# Altium PCB SiLPA.PcbDoc (part 7 of 10)
Units mm, origin at the board's own origin, x right, y up, seen from the top; angles counter-clockwise.
Board outline 222.36 x 100 mm, 4 copper layers (L1, P2, L3, L4), stack 1.598 mm thick; 583 components, 330 nets, 1692 pads, 1781 vias.
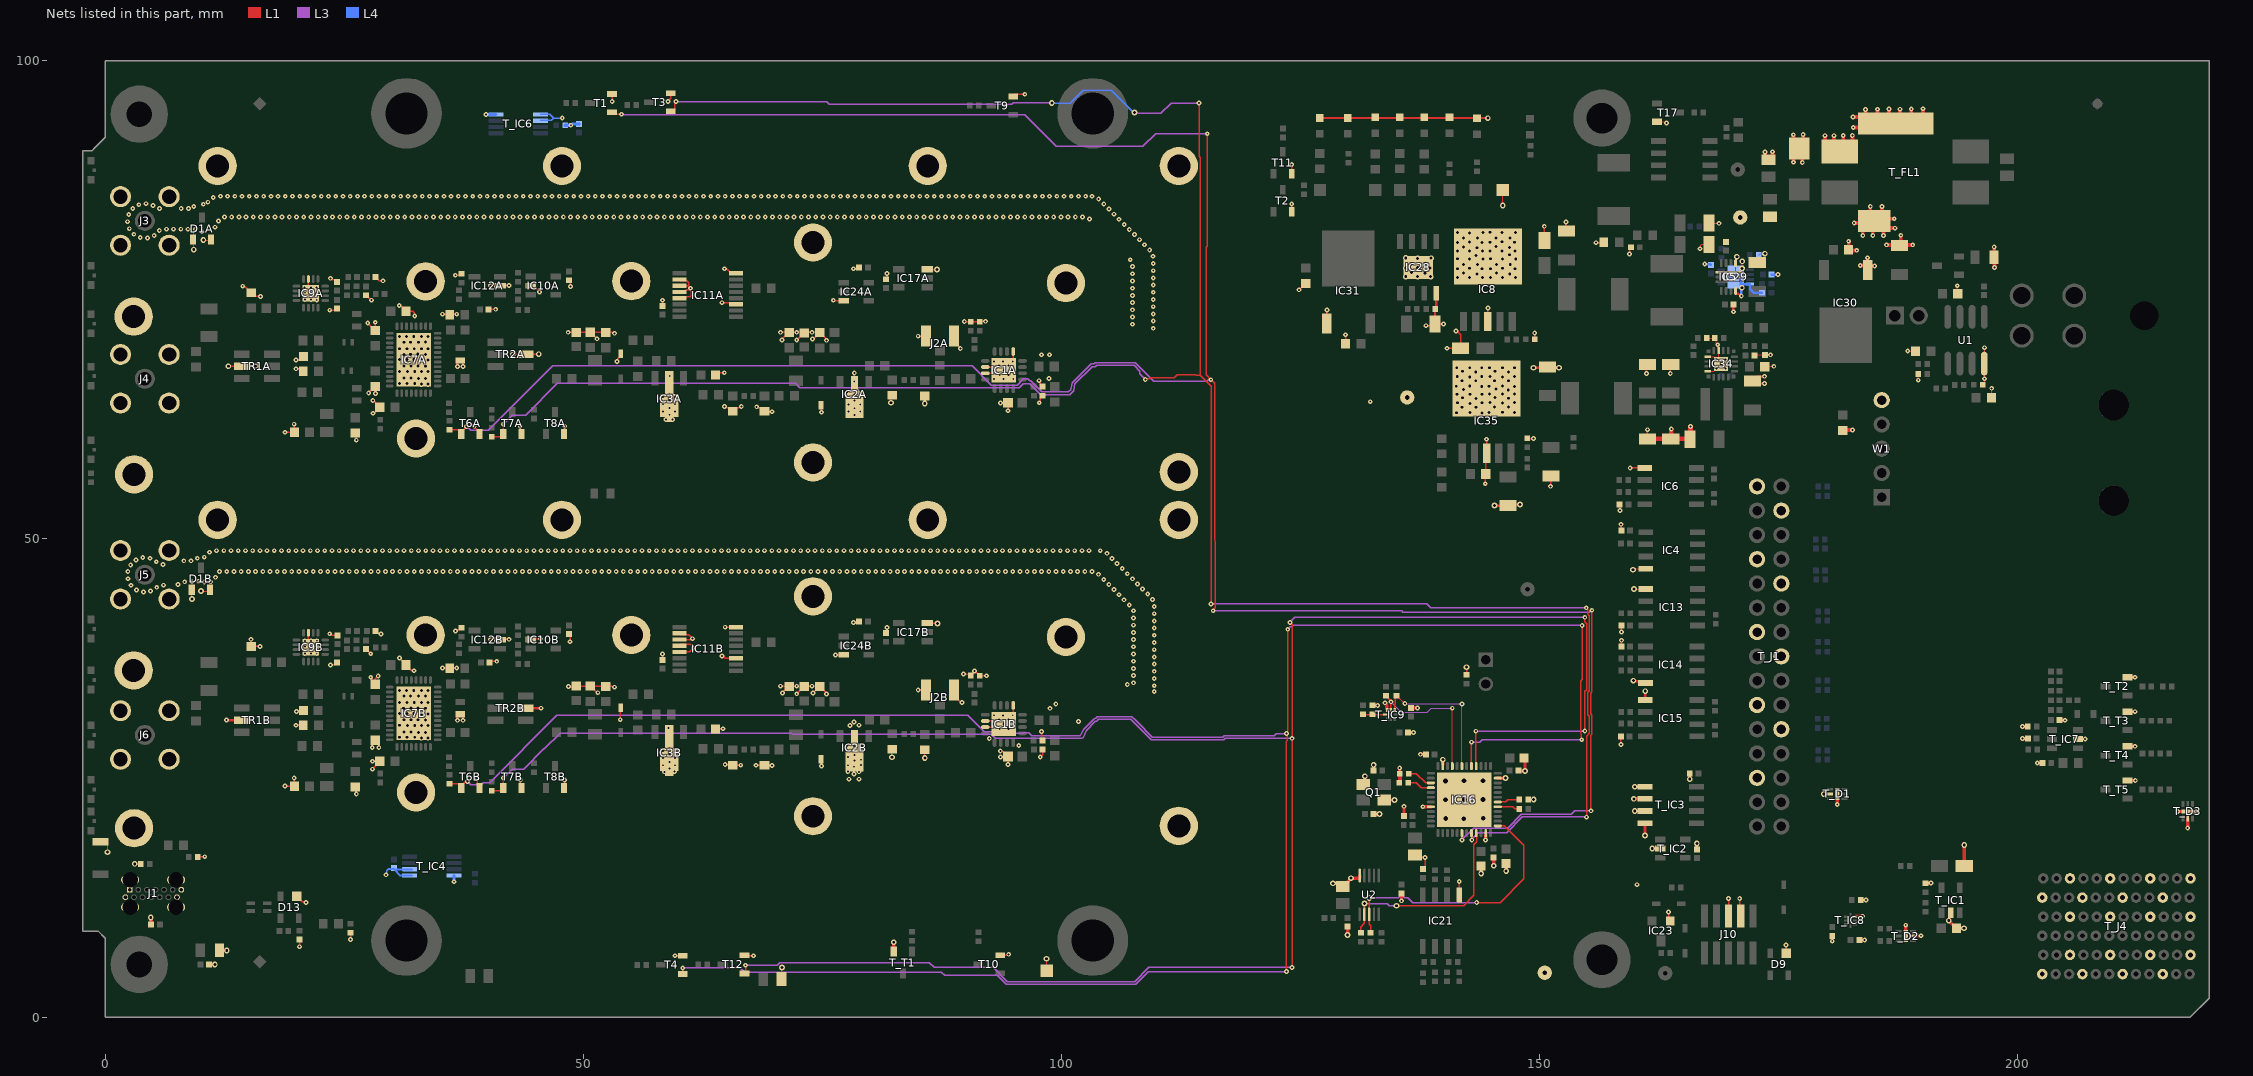
[diagram p7: the nets of this part, all layers, seen from the top]

## Via types
v1: diameter 0.5, hole 0.2, L1 to L4, tented both sides, 1301 vias
v2: diameter 0.6, hole 0.3, L1 to L4, tented both sides, 443 vias
v3: diameter 0.8, hole 0.5, L1 to L4, tented both sides, 25 vias
v4: diameter 0.5, hole 0.2, L1 to L4, 8 vias
v5: diameter 1.27, hole 0.711, L1 to L4, tented both sides, 4 vias

## Nets (pads, with @x,y where several pads share a name; then routed paths per layer and width w, separated by ;. In a path a pad name is that pad's centre, name@x,y a point inside that pad or via, vN(x,y) a via of type N, cw(c..) or ccw(c..) an arc to the next point about the centre after c; other vN are vias at no path point) (continued)
GND: B5A.1 B5B.1 B6A.1 B6B.1 B7A.1 B7B.1 B8A.1 B8B.1 B9A.1 B9B.1 B10A.1 B10B.1 B11A.1 B11B.1 B12A.1 B12B.1 B13A.1 B13B.1 B14A.1 B14B.1 B15A.1 B15B.1 B16A.1 B16B.1 B17A.1 B17B.1 C2A.1 C2B.1 C4A.1 C4B.1 C5A.1 C5B.1 C6A.1 C6B.1 C7A.1 C7B.1 C8A.1 C8B.1 C9A.1 C9B.1 C10.1 C17A.2 C17B.2 C18A.1 C18B.1 C19A.1 C19B.1 C20.1 C21.1 C22.1 C23.1 C24.1 C25.1 C26.1 C27.2 C28.1 C29.1 C30.1 C31.2 C32.1 C33.1 C34.1 C35.1 C36.2 C37.1 C38.1 C39A.1 C39B.1 C40A.1 C40B.1 C41A.2 C41B.2 C47A.1 C47B.1 C48A.1 C48B.1 C49A.1 C49B.1 C50A.1 C50B.1 C53A.1 C53B.1 C55A.2 C55B.2 C56A.1 C56B.1 C57A.2 C57B.2 C58A.1 C58B.1 C59A.1 C59B.1 C60A.2 C60B.2 C61A.1 C61B.1 C62.1 C63.1 C64.1 C65.2 C68.1 C69.1 C71.1 C72.1 C73.1 C74.1 C75.1 C76.1 C77.1 C78.1 C79.1 C80.1 C93.1 C94.1 C95.1 C96.1 C97.1 C98.1 C104.1 C105.1 C106.1 C107.1 C108.2 C110.1 C111.1 C112.1 C113.1 C114.1 C116.1 C245A.2 C245B.2 D1A.1 D1A.2 D1B.1 D1B.2 D2A.1 D2B.1 D3A.1 D3B.1 D9.1 D13.1 IC1A.5 IC1A.10 IC1A.11 IC1A.17 IC1B.5 IC1B.10 IC1B.11 IC1B.17 IC2A.2 IC2B.2 IC3A.2 IC3A.4 IC3B.2 IC3B.4 IC4.4 IC5.3 IC5.4 IC5.11 IC6.5 IC7A.41 IC7B.41 IC8.3 IC8.6 IC9A.11 IC9A.17 IC9B.11 IC9B.17 IC10A.2 IC10B.2 IC11A.3 IC11A.8 IC11A.10 IC11A.11 IC11A.12 IC11A.13 IC11B.3 IC11B.8 IC11B.10 IC11B.11 IC11B.12 IC11B.13 IC12A.2 IC12B.2 IC13.5 IC14.4 IC15.5 IC16.8 IC16.23 IC16.35 IC16.47 IC16.49 IC17A.3 IC17B.3 IC21.5 IC23.1 IC24A.3 IC24B.3 IC28.8 IC28.9 IC29.8 IC29.9 IC30.1 IC31.1 IC34.3 IC34.5 IC34.8 IC34.17 IC35.3 IC35.6 J1.1 J1.2 J1.3 J1.4 J1.A1 J1.A12 J1.B1 J1.B12 J2A.2 J2B.2 J3.2 J4.2 J5.2 J6.2 J10.3 J10.5 L18A.1 L18B.1 LD11.1 LD12.1 LD13.1 LD14.1 LD16.1 LD18.1 Q1.2 Q1.4 R1A.1 R1B.1 R2A.1 R2B.1 R7A.1 R7B.1 R8A.1 R8B.1 R9A.1 R9B.1 R10A.1 R10B.1 R13.2 R18A.1 R18B.1 R21A.1 R21B.1 R27A.1 R27B.1 R30.1 R33A.1 R33B.1 R48.1 R50.1 R58.1 R63.2 R68.1 R70.2 R76.1 R77.1 R78.1 R81.1 R83.1 R91.1 R94.2 R95.2 R101.2 R102.1 R103.1 SW1.2 T1.2 T2.2 T3.2 T4.2 T6A.2 T6B.2 T7A.2 T7B.2 T8A.2 T8B.2 T9.2 T10.2 T11.2 T12.2 T17.2 T_B4.1 T_B5.1 T_B6.1 T_C1.1 T_C2.2 T_C3.1 T_C4.1 T_C5.1 T_C8.1 T_C9.1 T_C10.1 T_C12.2 T_C13.2 T_C16.1 T_C20.1 T_C22.1 T_C23.1 T_C24.1 T_C25.1 T_D1.2 T_D1.7 T_D2.2 T_D2.7 T_D3.2 T_D3.7 T_D5.2 T_FL1.4 T_IC1.2 T_IC2.2 T_IC3.1 T_IC3.2 T_IC3.3 T_IC3.4 T_IC4.4 T_IC4.5 T_IC4.6 T_IC6.4 T_IC6.5 T_IC6.6 T_IC7.2 T_IC8.4 T_IC9.4 T_J1.1 T_J1.4 T_J1.7 T_J1.10 T_J1.13 T_J1.16 T_J1.19 T_J1.22 T_J1.25 T_J4.A2 T_J4.A4 T_J4.A6 T_J4.C1 T_J4.C5 T_J4.D2 T_J4.D4 T_J4.D6 T_J4.F1 T_J4.F5 T_J4.G2 T_J4.G4 T_J4.G6 T_J4.I1 T_J4.I5 T_J4.J2 T_J4.J4 T_J4.J6 T_J4.L1 T_J4.L5 T_LD4.1 T_R7.1 T_R19.1 T_R25.1 T_R26.2 T_R27.2 T_R30.1 T_R69.1 T_T1.2 T_T2.2 T_T3.2 T_T4.2 T_T5.2 TP22.1 TP23.1 TR1A.2 TR1B.2 TR2A.2 TR2B.2 U1.4 U2.10 W1.5 | length 390.5
  L1 w0.127: SW1.2@-0.5,18.32 -0.087,18.32 0.233,18.001 v2(0.233,17.25) ; v2(3.075,16.025) 3.698,16.025 R94.2@3.721,16.002 ; D1B.1@9.05,44.687 9.056,44.681 v2(9.056,43.71) ; v2(9.25,80.25) 9.25,81.205 D1A.1@9.162,81.293 9.265,81.396 9.265,82.144 9.407,82.286 v1(9.407,82.387) ; v2(10,44.544) 10.807,44.544 D1B.2@10.95,44.687 ; v2(10.25,81.25) 11.018,81.25 D1A.2@11.062,81.293 ; T_R27.2@70.71,4 70.75,4.04 v2(70.75,5.19) ; v1@78.325,67.3 78.325,66.353 IC2A.2@78.333,66.344 ; v2(82.157,64.24) 82.157,64.877 R8A.1@82.3,65.02 ; v2(82.25,27.169) 82.25,27.97 R8B.1@82.3,28.02 ; R7B.1@85.67,27.95 85.7,27.92 v2(85.7,27.1) ; R7A.1@85.67,64.95 85.68,64.94 v2(85.68,64.169) ; v2(98.425,6.1) 98.425,4.865 TP23.1@98.45,4.84 ; v2(146.13,84.852) TP22.1@146.13,86.5 ; R76.1@148.77,22.742 148.79,22.762 v2(149.36,22.762) ; v2(159.75,46.77) 159.851,46.77 159.976,46.895 IC4.4@161.079,46.895 ; v2(159.851,44.762) IC13.5@161.078,44.762 ; T17.2@162.275,93.625 163.024,93.625 163.149,93.5 v1(163.25,93.5) ; v1(166.75,80.344) 166.821,80.415 166.821,80.692 166.92,80.79 C33.1@167.685,80.79 ; R102.1@167.47,71 R101.2@168.28,71 168.433,70.847 v1@168.433,70.371 ; IC34.8@167.55,67.55 168.2,67.55 IC34.17@168.425,67.775 ; IC34.5@167.55,69.05 168.2,69.05 v1(168.475,68.775) ; C35.1@167.685,83.047 167.732,83 v1(168.75,83) ; v1@168.5,70.25 168.531,70.25 168.654,70.128 168.654,69.746 IC34.3@168.7,69.7 168.7,68.55 v1(168.95,68.3) ; IC5.3@169.729,77.89 IC5.3@170.399,77.89 ; IC5.4@170.5,78.5 170.493,78.5 170.479,78.485 170.479,77.97 IC5.3@170.399,77.89 ; v2(171.152,78.294) 171.061,78.204 171.061,78.044 170.907,77.89 IC5.3@170.399,77.89 ; v2@171.163,78.306 171.163,79.013 v2(171.175,79.025) ; C110.1@172.429,69.201 172.478,69.25 C111.1@173.529,69.25 v1(174.125,69.25) ; T_C10.1@173.522,89.684 T_C10.1@173.547,89.709 ; C108.2@173.525,68 173.575,68.05 v1(174.47,68.05) ; T_C10.1@174.316,89.709 T_C10.1@174.341,89.734 ; T_D5.2@176.486,91.478 T_D5.2@176.511,91.503 ; T_D5.2@176.518,90.142 T_D5.2@176.543,90.167 ; T_D5.2@177.451,90.128 T_D5.2@177.476,90.153 ; T_D5.2@177.511,91.503 T_D5.2@177.536,91.528 ; T_FL1.4@179.799,91.387 T_FL1.4@179.824,91.412 ; T_FL1.4@180.725,91.387 T_FL1.4@180.75,91.412 ; C69.1@181.7,61.35 C69.1@181.75,61.4 ; T_FL1.4@181.703,91.412 T_FL1.4@181.728,91.437 ; C68.1@182.275,80.35 C68.1@182.3,80.375 ; T_FL1.4@182.655,91.412 T_FL1.4@182.68,91.437 ; T_FL1.4@183.503,94.122 T_FL1.4@183.528,94.097 ; T_FL1.4@183.53,93.025 T_FL1.4@183.555,93 ; T_FL1.4@183.628,83.022 T_FL1.4@183.653,82.997 ; T_FL1.4@183.777,82.497 T_FL1.4@183.802,82.522 ; T_FL1.4@184.022,94.122 T_FL1.4@184.047,94.147 ; IC30.1@184.237,78.572 IC30.1@184.262,78.547 ; IC30.1@184.237,78.624 IC30.1@184.262,78.649 ; IC30.1@184.263,78.597 IC30.1@184.288,78.572 ; T_FL1.4@184.533,83.98 T_FL1.4@184.558,84.005 ; T_FL1.4@184.819,82.497 T_FL1.4@184.844,82.522 ; T_FL1.4@185.289,94.147 T_FL1.4@185.314,94.172 ; T_FL1.4@185.75,83.98 T_FL1.4@185.775,84.005 ; T_FL1.4@185.953,82.497 T_FL1.4@185.978,82.522 ; T_FL1.4@186.351,82.522 T_FL1.4@186.376,82.497 ; T_FL1.4@186.351,83.57 T_FL1.4@186.376,83.545 ; T_FL1.4@186.478,94.172 T_FL1.4@186.503,94.197 ; T_FL1.4@187.636,94.155 T_FL1.4@187.661,94.18 ; v1(188.475,69.65) 189.275,69.65 C112.1@189.3,69.625 ; T_FL1.4@188.816,94.167 T_FL1.4@188.841,94.192 ; R58.1@189.56,67.25 189.575,67.235 v1(189.575,66.6) ; T_FL1.4@190.031,94.202 T_FL1.4@190.056,94.227 ; v1(193.65,76.475) 193.65,75.675 C113.1@193.7,75.625 ; R68.1@196.295,66.125 196.5,66.33 v1(196.5,66.75) U1.4@196.5,67.8 ; U1.4@196.5,68.95 v1(196.5,70) ; C93.1@197.25,64.7 v1(197.25,65.75) ; R91.1@197.5,79.45 R91.1@197.55,79.4 ; R91.1@197.5,79.7 R91.1@197.513,79.713
  L1 w0.152: R13.2@9.67,16.754 9.691,16.775 v1(10.4,16.775) ; v2(12.866,68.055) TR1A.2@14.257,68.055 ; TR1A.2@14.265,68.047 14.273,68.055 v2(15.718,68.055) ; v1(14.375,76.43) 14.442,76.363 14.617,76.363 15.2,75.78 15.25,75.78 15.654,75.376 16.203,75.376 v1(16.221,75.358) ; v1(15.25,39.5) 15.25,38.78 R27B.1@15.28,38.75 15.296,38.766 v1(16.163,38.766) ; v1(18.8,24.156) 19.766,24.156 C40B.1@19.77,24.16 19.75,24.18 v1(19.75,25) ; v1(18.8,61.156) 19.766,61.156 C40A.1@19.77,61.16 19.75,61.18 v1(19.75,62) ; v1(19.933,30.521) R21B.1@20.69,30.521 ; v1(19.933,67.786) 20.426,67.786 R21A.1@20.69,67.521 ; v1(19.933,68.705) 20.385,68.705 C50A.1@20.74,69.06 ; v1(19.997,31.961) 20.641,31.961 C50B.1@20.74,32.06 ; D13.1@20.016,12.645 20.599,12.063 20.906,12.063 v1(20.973,11.996) ; v1(20.32,7.366) C74.1@20.32,8.128 ; IC9B.11@21.24,40.18 21.24,39.46 IC9B.17@21.3,39.4 ; IC9A.11@21.24,77.18 21.24,76.46 IC9A.17@21.3,76.4 ; v1(23.463,40.081) 23.557,40.081 23.712,39.925 24.251,39.925 C60B.2@24.286,39.89 ; v1(23.467,73.92) 24.029,73.92 C59A.1@24.209,74.1 ; v1(23.554,36.815) 23.605,36.866 23.975,36.866 C59B.1@24.209,37.1 ; v1(23.554,77.25) 23.648,77.25 23.784,77.114 23.975,77.114 C60A.2@24.209,76.88 ; v1(25.654,8.128) R70.2@25.654,8.801 ; C39B.1@26.136,24.075 26.25,23.961 v1(26.25,23.325) ; C39A.1@26.136,61.075 26.25,60.961 v1(26.25,60.325) ; C55B.2@27.27,38.48 27.754,37.996 v1(27.754,37.99) ; C55A.2@27.27,75.48 27.785,74.965 v1(27.843,74.965) ; v1(27.442,72.566) 27.442,72.558 C41A.2@28.25,71.75 ; v1(27.539,65.25) 27.539,65.289 28.25,66 v1(28.25,65.2) ; v1(27.754,35.537) 27.754,35.484 27.851,35.387 27.851,35.149 28.25,34.75 28.25,35.374 v1(28.536,35.66) ; v1(27.917,28.2) 27.917,28.667 28.25,29 28.605,28.645 v1(28.605,28.2) ; v1(27.95,25.923) 27.95,25.975 28.7,26.725 C49B.1@28.7,26.75 v1(27.95,26.75) ; v1(27.978,64.475) 28,64.475 28.7,63.775 28.7,63.725 28.179,63.204 28.067,63.204 v1(28,63.137) ; C41A.2@28.227,71.773 v1(28.227,72.66) ; C53B.1@28.275,40.375 28.508,40.141 28.696,40.141 28.767,40.071 v1(28.821,40.071) ; C53A.1@28.275,77.375 28.66,76.989 v1(29.051,76.989) ; v1(30.733,74.397) 30.8,74.33 30.954,74.33 31.445,73.84 C48A.1@31.445,73.815 32.133,73.815 32.289,73.658 32.289,73.374 v1(32.356,73.307) ; v1(30.75,37.537) 31.046,37.241 31.046,37.214 C48B.1@31.445,36.815 31.445,36.79 31.843,36.391 31.868,36.391 31.979,36.281 32.199,36.281 v1(32.266,36.215) ; v1(35.25,36.5) 35.967,36.5 R18B.1@36.006,36.461 36.045,36.5 v1(36.75,36.5) ; v1(35.25,73.5) 35.967,73.5 R18A.1@36.006,73.461 36.045,73.5 v1(36.75,73.5) ; v1(36.6,77.575) 37.105,77.575 R33A.1@37.25,77.72 ; v1(36.606,40.375) 36.7,40.375 36.832,40.506 37.036,40.506 R33B.1@37.25,40.72 ; v1(38.589,61.793) 38.656,61.726 38.656,61.623 39.118,61.16 T6A.2@39.118,60.96 ; v1(38.81,25) 38.87,24.941 38.87,24.209 T6B.2@39.118,23.96 ; C57A.2@40.079,73.974 40.11,74.005 v1(40.821,74.005) ; C57B.2@40.178,37.1 40.278,37.2 v1(40.929,37.2) ; v1(40.25,39.5) 41.255,39.5 IC12B.2@41.286,39.469 41.317,39.5 v1(42.2,39.5) ; v1(40.25,76.5) 41.255,76.5 IC12A.2@41.286,76.469 41.317,76.5 v1(42.2,76.5) ; v2(42.624,69.31) 43.958,69.31 43.965,69.303 43.982,69.32 v2(45.331,69.32) ; v1(43.4,24.793) 43.4,24.07 T7B.2@43.51,23.96 ; v1(43.4,61.793) 43.4,61.07 T7A.2@43.51,60.96 ; IC10B.2@44.49,39.48 44.575,39.565 v1(45.5,39.565) ; IC10A.2@44.49,76.48 44.74,76.48 45.404,75.816 v1(45.417,75.816) ; T8B.2@47.977,23.96 48.017,24.001 v1(48.017,24.793) ; T8A.2@47.977,60.96 48.017,61.001 v1(48.017,61.793) ; v1(48.4,71.6) C9A.1@49.26,71.6 C8A.1@50.765,71.6 ; C61B.1@48.5,40.05 48.6,39.95 v1(48.6,39.25) ; C61A.1@48.5,77.05 48.642,76.908 v1(48.642,76.4) ; v1@48.586,34.49 C9B.1@49.382,34.49 ; C9B.1@49.26,34.6 C8B.1@50.765,34.6 ; C8B.1@50.731,34.609 50.756,34.609 C8B.1@50.765,34.6 ; C8A.1@50.731,71.609 50.756,71.609 C8A.1@50.765,71.6 ; v1(51.425,70.925) 51.425,70.94 C8A.1@50.765,71.6 ; v1(51.5,33.925) 51.44,33.925 C8B.1@50.765,34.6 ; C7B.1@52.25,34.5 52.15,34.6 C8B.1@50.765,34.6 ; C7A.1@52.25,71.5 52.15,71.6 C8A.1@50.765,71.6 ; C7B.1@52.31,34.59 53.107,34.59 53.197,34.5 v1(53.25,34.5) ; C7A.1@52.31,71.59 53.107,71.59 53.197,71.5 v1(53.25,71.5) ; T1.2@52.985,96.52 53,96.505 v1(53,95.75) ; v1(53.5,68.545) 53.567,68.612 53.567,68.837 53.89,69.16 D3A.1@53.89,69.36 ; v1(53.85,31.097) 53.85,32.32 D3B.1@53.89,32.36 ; C56B.1@58.268,37.35 v1(58.268,37.956) ; C56A.1@58.268,74.35 v1(58.268,74.956) ; v1(58.85,95.725) 58.85,95.816 59.114,96.081 T3.2@59.114,96.609 ; v1(59.561,6.418) T4.2@60.386,6.418 ; IC11B.13@60.05,38.175 60.199,38.324 60.298,38.224 60.398,38.324 60.497,38.224 61.098,38.224 v1(61.469,38.595) 61.469,38.689 61.348,38.81 61.348,38.846 61.203,38.99 60.788,38.99 60.771,38.974 60.199,38.974 IC11B.12@60.05,38.825 ; IC11B.11@60.05,39.475 61.213,39.475 61.243,39.505 61.277,39.505 61.307,39.475 v1(61.403,39.571) 60.998,39.976 60.199,39.976 IC11B.10@60.05,40.125 ; IC11A.13@60.05,75.175 60.199,75.324 61.173,75.324 61.262,75.413 61.262,76.149 v1(61.196,76.216) 61.141,76.216 v1@61,76.075 ; IC11A.12@60.05,75.825 60.55,75.825 60.8,76.075 v1@61,76.075 ; IC11A.11@60.05,76.475 61,76.475 ; IC11A.10@60.05,77.125 60.199,76.976 60.822,76.976 61,76.798 61,76.475 ; C2B.1@63.81,30.12 63.84,30.15 v1(64.594,30.15) ; C2A.1@63.81,67.12 64.062,67.372 v1(64.727,67.372) ; v1(64.5,37.75) 64.594,37.75 64.819,37.525 IC11B.3@65.95,37.525 ; v1(64.5,74.706) 64.532,74.674 65.801,74.674 IC11A.3@65.95,74.525 ; v1(64.742,63.835) 64.836,63.835 64.957,63.714 65.236,63.714 R10A.1@65.61,63.34 65.984,63.714 66.272,63.714 66.411,63.853 v1(66.505,63.853) ; v1(64.75,78.25) 64.788,78.212 65.013,78.212 65.45,77.775 IC11A.8@65.95,77.775 ; v1(64.819,26.4) 65.55,26.4 R10B.1@65.61,26.34 v1(66.45,26.34) ; v1(64.819,40.775) IC11B.8@65.95,40.775 ; T12.2@66.838,6.458 66.878,6.418 v1(67.79,6.418) ; v1(68.04,26.331) 68.939,26.331 68.97,26.3 v1(69.7,26.3) ; v1(68.11,63.812) 68.204,63.812 68.302,63.714 68.556,63.714 68.97,63.3 v1(69.7,63.3) ; v1(70.6,34.6) 71.51,34.6 C6B.1@71.52,34.59 ; v1(70.6,71.6) 71.51,71.6 C6A.1@71.52,71.59 ; v1(70.759,70.79) 70.759,70.854 71.495,71.59 C6A.1@71.52,71.59 ; v1(70.8,33.9) 70.805,33.9 71.495,34.59 C6B.1@71.52,34.59 ; v1(72.3,33.8) 72.325,33.8 73.075,34.55 C4B.1@73.1,34.55 73.15,34.6 v1(73.9,34.6) ; v1(72.3,34.6) 71.53,34.6 C6B.1@71.52,34.59 ; v1(72.3,70.8) 72.325,70.8 73.075,71.55 C4A.1@73.1,71.55 73.15,71.6 v1(73.9,71.6) ; v1(72.3,71.6) 71.53,71.6 C6A.1@71.52,71.59 ; v1(73.95,70.9) 74.016,70.9 74.551,71.435 C5A.1@74.7,71.435 ; v1(74,33.9) 74.016,33.9 74.576,34.46 C5B.1@74.7,34.46 ; C5B.1@74.715,34.574 74.715,34.46 74.855,34.46 75.341,33.974 75.341,33.84 v1(75.407,33.774) ; C5A.1@74.715,71.574 74.715,71.435 74.88,71.435 75.352,70.962 75.352,70.833 v1(75.419,70.767) ; D2B.1@74.85,26.98 74.881,26.949 v1(74.881,26.25) ; D2A.1@74.85,63.98 74.881,63.949 v1(74.881,63.25) ; v1(76.125,74.956) 76.187,74.895 IC24A.3@77.233,74.895 ; v1(76.35,37.875) 77.213,37.875 IC24B.3@77.233,37.895 ; v1(78.25,41.25) 78.708,41.25 C245B.2@78.833,41.375 ; v1(78.25,78.25) 78.708,78.25 C245A.2@78.833,78.375 ; C58B.1@81.64,40.15 81.75,40.26 v1(81.75,40.75) ; C58A.1@81.64,77.15 81.75,77.26 v1(81.75,77.75) ; v1(85,34.2) 85.785,34.2 J2B.2@85.805,34.22 ; v1(85,71.2) 85.785,71.2 J2A.2@85.805,71.22 ; IC17B.3@85.792,41.25 85.877,41.164 v2(87.015,41.164) ; IC17A.3@85.94,78.209 85.95,78.219 85.997,78.172 v2(86.964,78.172) v2@86.917,78.219 ; J2B.2@88.755,34.22 88.755,33.645 89.509,32.891 v1(89.588,32.891) ; J2A.2@88.755,71.22 88.755,70.645 89.405,69.995 v1(89.405,69.903) ; v1(89.75,35.869) 90.351,35.869 R1B.1@90.5,35.72 90.52,35.72 90.734,35.934 90.734,35.954 90.8,36.02 v1@90.8,36.1 ; v1(89.825,72.725) 90.495,72.725 R1A.1@90.5,72.72 91.43,72.72 R2A.1@91.44,72.71 91.48,72.75 v1(92.05,72.75) ; v1(90.9,36.2) 90.93,36.2 91.42,35.71 R2B.1@91.44,35.71 91.458,35.692 v1(92.154,35.692) ; IC1B.11@92.012,30.321 92.979,30.321 IC1B.17@93,30.3 ; IC1B.10@92.012,30.971 92.971,30.971 IC1B.17@93,31 ; IC1A.11@92.012,67.321 92.979,67.321 IC1A.17@93,67.3 ; IC1A.10@92.012,67.971 92.971,67.971 IC1A.17@93,68 ; T10.2@93.592,6.476 94.319,6.476 94.409,6.566 v1(94.462,6.566) ; v1(93.592,27.831) 93.659,27.764 93.876,27.764 C18B.1@94.39,27.25 ; v1(93.6,27.2) 94.34,27.2 C18B.1@94.39,27.25 ; v1(93.6,64.2) 94.34,64.2 C18A.1@94.39,64.25 94.4,64.24 v1(94.4,63.4) ; IC1B.17@93.808,30.8 IC1B.17@93.962,30.646 ; IC1A.17@93.808,67.8 IC1A.17@93.962,67.646 ; v1(94.4,26.4) 94.4,27.24 C18B.1@94.39,27.25 ; IC1B.17@94.9,31.7 94.937,31.737 IC1B.5@94.937,32.596 ; IC1A.17@94.9,68.7 94.937,68.737 IC1A.5@94.937,69.596 ; T9.2@94.941,96.25 95.164,96.474 96.126,96.474 v1(96.153,96.5) ; v1(97.63,66.55) 97.63,66.456 97.746,66.34 97.746,66.164 C17A.2@97.98,65.93 ; v1(97.661,64.24) 97.661,64.334 97.756,64.43 97.756,64.736 C19A.1@97.99,64.97 ; v1(97.76,27.2) 97.76,27.21 98,27.45 98,27.96 C19B.1@97.99,27.97 ; v1(97.903,29.873) 97.903,29.007 C17B.2@97.98,28.93 ; T2.2@124.066,84.2 v1(124.066,85.025) ; T11.2@124.066,88.186 v1(124.066,89.156) ; v1(124.825,76.05) 124.839,76.05 125.515,76.726 C98.1@125.54,76.726 ; IC31.1@127.707,72.543 127.745,72.582 v1(127.745,73.943) ; C97.1@129.687,70.41 v1(129.687,71.354) ; C94.1@136.948,16.925 137.173,16.7 v1(137.999,16.7) 137.999,15.689 C116.1@137.775,15.465 ; v1(138.104,72.297) 138.867,72.297 C30.1@139.049,72.479 139.069,72.46 v1(139.944,72.46) ; v1(140.29,69.94) C31.2@141.7,69.94 141.711,69.951 141.711,71.354 141.315,71.75 v1(141.25,71.75) ; IC21.5@141.575,12.775 v1(141.575,14.17) ; R63.2@142.336,35.796 v2(142.336,36.592) ; v1(144.3,55.772) 144.3,56.744 C26.1@144.344,56.788 144.344,58.859 IC35.3@144.44,58.955 v1(144.44,60.426) ; IC8.3@144.566,72.74 144.578,72.752 v1(144.578,74.14) ; R103.1@148.684,60.52 148.717,60.487 v1(149.348,60.487) ; R81.1@149.464,70.881 v1(149.464,71.545) ; C27.2@150.473,81.19 v1(150.473,82.69) ; v1(151.121,55.498) 151.121,56.529 C106.1@151.177,56.586 ; v1(152.725,83.15) 152.725,82.246 C28.1@152.781,82.19 ; v1(155.869,80.975) 156.675,80.975 R30.1@156.7,81 ; C10.1@158.354,53.615 158.375,53.594 v1(158.375,52.958) ; v1(158.489,28.509) 158.489,29.357 C64.1@158.491,29.359 ; v1(158.497,51.525) 158.497,50.932 C32.1@158.529,50.9 ; v1(158.533,39.395) 158.533,38.775 C62.1@158.537,38.771 ; v1(158.537,40.258) 158.537,40.941 C63.1@158.548,40.952 ; v1(159.386,79.802) 159.386,80.336 C77.1@159.55,80.5 ; v1(159.448,57.425) IC6.5@160.978,57.425 ; v1(161.153,67.3) 161.153,68.153 C25.1@161.25,68.25 ; C23.1@161.25,60.474 v1(161.25,61.424) ; v1(163.466,11.001) 163.483,10.985 163.483,10.203 IC23.1@163.647,10.038 ; v1(163.65,67.3) 163.65,68.2 C104.1@163.7,68.25 ; J10.5@169.74,10.589 v1(169.74,12.4) ; v1(170.9,12.4) 170.9,10.699 J10.3@171.01,10.589 ; v1(175.75,7.55) 175.75,6.723 D9.1@175.785,6.689 ; v1@61,76.075 61,76.475
  L1 w0.254: v1(12.665,31.057) 12.676,31.047 TR1B.2@14.265,31.047 ; v1(36.824,31.033) 36.824,31.477 37.017,31.67 37.208,31.67 37.401,31.477 v1(37.401,31.033) ; v1(36.824,68.033) 36.824,68.477 37.017,68.67 37.208,68.67 37.401,68.477 v1(37.401,68.033) ; TR2B.2@43.965,32.303 45.562,32.303 v1(45.565,32.299) ; LD16.1@127,94.016 144.55,94.016 v2(144.566,94) ; C30.1@139.049,72.479 139.044,72.484 139.044,73.907 139.179,74.042 IC28.8@139.179,75.686 ; v2(145.275,53.487) C105.1@146.665,53.487 146.778,53.6 v2(147.934,53.6) ; v2(149.348,67.895) 150.695,67.895 C24.1@150.8,68 150.905,67.895 v2(152,67.895) ; v2(159.783,35.178) 159.85,35.112 160.916,35.112 IC14.4@161.067,34.961 ; IC15.5@161.024,33.169 v2(161.024,34.081) ; v1(170.25,73.75) C36.2@170.25,74.5 ; IC5.11@170.479,75.94 170.479,75.677 170.5,75.656 170.75,75.656 171.006,75.4 v1(171.073,75.4) ; v1(173.5,66.25) 172.5,66.25 C37.1@172.25,66.5 172.698,66.948 173.381,66.948 173.433,67 v1(173.5,67) ; v2(179.695,23.328) T_D1.2@180.34,23.328
  L1 w0.3: IC16.35@145.553,24.992 IC16.35@145.906,24.992 ; T_IC8.4@182.958,10.501 T_IC8.4@182.983,10.526
  L1 w0.35: T_C12.2@10.845,5.512 v2(11.455,5.512) ; T_R26.2@11.925,6.975 v2(12.7,6.975) ; T_T1.2@82.452,6.843 v2(82.452,7.827) ; v2(128.375,13.985) 129.094,13.985 C21.1@129.4,13.68 ; C21.1@129.55,13.68 129.95,14.08 129.95,14.199 130.25,14.499 v2(130.25,14.53) 131.113,14.53 131.163,14.58 U2.10@131.163,14.8 ; v2(129.9,8.578) C20.1@129.9,9.474 ; Q1.2@131.529,24.3 131.703,24.474 v2(131.703,25.182) ; T_R69.1@132.483,32.595 v1(133.043,32.595) v1@133.043,32.566 ; C71.1@132.615,21.228 v2(133.225,21.228) ; C65.2@132.625,25.767 v2(132.625,26.377) ; Q1.4@133.729,22.7 v2(134.81,22.7) ; v1(133.81,32.86) 133.839,32.831 133.839,32.773 134.029,32.584 134.029,32.485 134.004,32.46 T_IC9.4@134.004,32.21 ; v1(135.54,12.154) C22.1@135.54,12.946 ; C72.1@135.8,21.05 v1(135.8,22.039) ; T_C24.1@136.234,29.76 v1(136.794,29.76) ; T_C25.1@136.544,32.335 136.548,32.331 137.22,32.331 v1(137.225,32.326) ; v1(137.77,21.992) IC16.8@138.653,21.992 ; IC16.47@139.853,26.442 139.853,26.907 v2(139.863,26.917) ; v2(143.865,15.026) C80.1@143.865,15.801 ; v1(144.328,18.518) 144.353,18.542 IC16.23@144.353,19.042 ; C76.1@145.168,16.71 145.178,16.7 145.178,15.827 v2(145.181,15.825) ; IC16.35@145.906,24.992 146.422,24.992 v2(146.425,24.995) ; v2(146.478,15.283) C75.1@146.478,16.058 ; C78.1@147.75,25.767 147.771,25.746 148.44,25.746 v2(148.461,25.725) ; C73.1@148.355,27.084 148.445,26.994 v2@148.445,25.767 ; v2(159.835,22.822) T_IC3.2@161,22.822 ; v2@159.91,24.077 v2(159.925,24.092) T_IC3.1@161,24.092 ; v2(159.925,21.552) T_IC3.3@161,21.552 ; v2(161,18.985) T_IC3.4@161,20.282 ; v2@161.742,17.637 v2(161.754,17.625) T_IC2.2@162.604,17.625 ; T_C4.1@165.682,25.492 v2(165.682,24.882) v2@165.754,24.954 ; T_C3.1@166.424,17.537 v2(166.424,18.147) ; v1(180.583,7.941) T_C22.1@180.583,8.501 ; v1(181.1,22.228) T_D1.7@181.1,23.328 ; T_IC8.4@182.983,10.526 183.008,10.551 183.108,10.551 183.111,10.555 v1(183.74,10.555) 183.699,10.555 v1@183.646,10.501 ; T_C23.1@183.408,8.051 v1(183.968,8.051) ; T_R19.1@183.568,12.24 v1(184.108,12.24) v1@184.108,12.327 ; T_D2.7@188.263,8.478 v1(188.263,9.612) ; T_D2.2@189.023,8.478 189.843,8.478 v1(189.869,8.504) ; T_R7.1@190.334,14.003 190.345,14.014 190.35,14.009 190.888,14.009 v1(190.894,14.014) ; T_IC1.2@192.962,10.933 192.837,10.808 192.837,10.227 192.76,10.151 v2(192.76,10.083) 193.235,9.609 193.281,9.609 193.581,9.309 T_C1.1@193.581,9.284 v2(194.356,9.284) ; T_C2.2@194.381,15.79 v2(194.381,18.006) ; v1(200.475,30.372) T_R30.1@201.028,30.372 ; v1(200.488,29.122) T_C13.2@201.048,29.122 ; v1(202.018,26.572) T_C20.1@202.578,26.572 ; T_C16.1@204.348,31.064 204.359,31.054 204.906,31.054 v1(204.916,31.044) ; T_IC7.2@206.253,29.072 v1(207.028,29.072) v1@207.004,29.047 ; T_T5.2@211.464,24.745 v1(212.274,24.745) ; T_T4.2@211.464,28.312 v1(212.239,28.312) v1@212.274,28.346 ; T_T3.2@211.464,31.935 v1(212.239,31.935) ; T_T2.2@211.464,35.538 v1(212.239,35.538) ; v1(216.703,21.503) v1(218.646,21.503) ; v1(217.746,19.775) T_D3.2@217.746,20.743
  L1 w0.4: v2(4.751,10.42) 4.765,10.406 4.765,9.708 R95.2@4.78,9.693 ; R78.1@135.318,24.505 135.365,24.552 R77.1@135.365,25.443 ; R77.1@135.349,25.475 v1(135.349,26.043) ; v1(137.539,27.478) C79.1@138.107,27.478 ; T_C10.1@173.547,89.709 v1(173.547,90.464) ; T_C10.1@174.341,89.734 v1(174.341,90.489) ; T_D5.2@176.511,91.503 v1(176.511,92.258) ; v1(176.518,89.386) T_D5.2@176.518,90.142 ; v1(177.451,89.373) T_D5.2@177.451,90.128 ; T_D5.2@177.536,91.528 v1(177.536,92.283) ; T_FL1.4@179.824,91.412 v1(179.824,92.168) ; T_FL1.4@180.75,91.412 v1(180.75,92.168) ; T_FL1.4@181.728,91.437 v1(181.728,92.193) ; C69.1@181.75,61.4 v1(182.7,61.4) ; C68.1@182.25,80.175 v1(183.145,80.175) ; C68.1@182.3,80.375 v1(182.3,81.13) ; T_FL1.4@182.68,91.437 v1(182.68,92.193) ; v1(182.747,94.122) T_FL1.4@183.503,94.122 ; v1(182.774,93.025) T_FL1.4@183.53,93.025 ; v1(182.873,83.022) T_FL1.4@183.628,83.022 ; v1(183.508,78.597) IC30.1@184.263,78.597 ; v1(183.777,81.741) T_FL1.4@183.777,82.497 ; T_FL1.4@184.047,94.147 v1(184.047,94.902) ; IC30.1@184.262,78.547 v1(185.017,78.547) ; IC30.1@184.262,78.649 v1(184.262,79.404) ; T_FL1.4@184.558,84.005 v1(184.558,84.76) ; v1(184.819,81.741) T_FL1.4@184.819,82.497 ; T_FL1.4@185.314,94.172 v1(185.314,94.927) ; T_FL1.4@185.775,84.005 v1(185.775,84.76) ; v1(185.953,81.741) T_FL1.4@185.953,82.497 ; v1(186.25,80.75) C114.1@187.3,80.75 ; T_FL1.4@186.376,82.497 v1(187.131,82.497) ; T_FL1.4@186.376,83.545 186.442,83.48 v1(187.066,83.48) ; T_FL1.4@186.503,94.197 v1(186.503,94.952) ; T_FL1.4@187.661,94.18 v1(187.661,94.936) ; C114.1@187.75,80.7 v1(187.75,81.75) ; C114.1@187.95,80.75 v1(189,80.75) ; T_FL1.4@188.841,94.192 v1(188.841,94.947) ; T_FL1.4@190.056,94.227 v1(190.056,94.982) ; R91.1@197.513,79.713 v1(197.513,80.513) ; v1(197.55,78.375) R91.1@197.55,79.4
  L1 w0.508: C23.1@161.25,60.474 C29.1@163.7,60.474 ; v1(163.75,61.5) 163.75,60.524 C29.1@163.7,60.474 ; v1(165.75,61.75) 165.75,60.461 C107.1@165.715,60.426 165.667,60.474 C29.1@163.7,60.474
  L4 w0.127: R48.1@172.899,79.68 173.051,79.833 v2(173.529,79.833)
  L4 w0.152: T_IC6.6@45.46,93.754 46.65,93.754 46.9,94.004 ; T_IC6.5@45.46,94.404 46.5,94.404 46.9,94.004 ; v1(47.78,94.004) 46.9,94.004
  L4 w0.2: v1(29.365,14.876) 29.431,14.943 29.431,15.317 29.615,15.5 30.122,15.5 30.144,15.522 T_C8.1@30.212,15.454 ; T_IC4.5@32.071,14.804 30.862,14.804 T_C8.1@30.212,15.454 ; T_IC4.6@32.071,15.454 T_C8.1@30.212,15.454
  L4 w0.254: v1(167.25,78.75) 167.293,78.707 167.843,78.707 C95.1@167.885,78.665 ; IC29.9@170.479,77.39 171,76.869 IC29.9@171,76.867 ; v1(171.073,75.4) 171.073,76.186 171,76.259 IC29.9@171,76.867 ; R50.1@173.229,75.72 172.408,75.72 171.979,76.15 IC29.8@171.979,76.64 171.227,76.64 IC29.9@171,76.867 ; C96.1@174.239,77.64 174.244,77.645 174.895,77.645 v1(174.9,77.65)
  L4 w0.35: v1(36.471,14.15) T_IC4.4@36.471,14.804 ; v1(39.805,94.376) T_IC6.4@40.86,94.376 ; T_R25.1@48.11,93.255 v1(48.676,93.255) 48.717,93.255 48.857,93.395 T_C5.1@49.552,93.395
  other v1: 160.175,13.85 77.777,24.875 78.824,24.875 78.295,25.41 58.454,25.649 78.824,25.649 59.52,25.66 77.646,25.66 58.986,25.981 78.295,26.179 58.336,26.331 59.586,26.331 77.646,26.331 79.021,26.34 58.986,26.681 78.328,26.835 79.021,26.907 58.336,27.081 59.586,27.081 77.646,27.2 78.328,27.409 58.986,27.481 58.336,27.831 59.586,27.831 77.646,27.831 79.021,27.831 58.986,28.081 78.29,28.332 95.514,28.408 92.437,29.121 93.531,30.135 94.431,30.135 58.9,30.25 77.875,30.5 78.825,30.525 92.931,30.635 93.931,30.635 94.881,30.645 78.285,30.845 101.771,30.916 93.431,31.135 94.431,31.135 92.944,31.565 93.85,31.55 94.888,31.565 98.778,32.286 99.392,32.725 109.684,34.032 48.442,34.58 109.684,34.646 106.87,34.78 107.516,34.951 109.684,35.4 107.516,35.705 109.684,36.154 107.516,36.459 109.684,36.908 107.516,37.213 109.684,37.662 107.516,37.967 22.115,37.99 20.868,38.02 21.498,38.04 109.684,38.416 22.098,38.64 21.488,38.72 107.516,38.721 20.898,38.74 109.684,39.17 20.868,39.334 21.498,39.34 22.118,39.352 107.516,39.475 109.684,39.924 107.516,40.229 109.684,40.678 107.516,40.983 109.684,41.432 107.516,41.737 109.684,42.186 107.516,42.491 109.684,42.94 107.068,43.098 106.535,43.631 109.512,43.674 106.002,44.164 109.002,44.23 3.988,44.447 4.736,44.544 3.266,44.662 105.469,44.697 108.469,44.763 5.379,44.937 2.696,45.157 6.098,45.166 7.603,45.229 104.936,45.231 107.936,45.296 8.302,45.512 9.056,45.512 10.349,45.493 11,45.512 9.75,45.566 104.402,45.764 2.372,45.837 107.403,45.83 11.519,45.985 103.869,46.297 106.87,46.363 2.357,46.591 11.948,46.606 12.702,46.606 13.456,46.606 14.21,46.606 14.964,46.606 15.718,46.606 16.472,46.606 17.226,46.606 17.98,46.606 18.734,46.606 19.488,46.606 20.242,46.606 20.996,46.606 21.75,46.606 22.504,46.606 23.258,46.606 24.012,46.606 24.766,46.606 25.52,46.606 26.274,46.606 27.028,46.606 27.782,46.606 28.536,46.606 29.29,46.606 30.044,46.606 30.798,46.606 31.552,46.606 32.306,46.606 33.06,46.606 33.814,46.606 34.568,46.606 35.322,46.606 36.076,46.606 36.83,46.606 37.584,46.606 38.338,46.606 39.092,46.606 39.846,46.606 40.6,46.606 41.354,46.606 42.108,46.606 42.862,46.606 43.616,46.606 44.37,46.606 45.124,46.606 45.878,46.606 46.632,46.606 47.386,46.606 48.14,46.606 48.894,46.606 49.648,46.606 50.402,46.606 51.156,46.606 51.91,46.606 52.664,46.606 53.418,46.606 54.172,46.606 54.926,46.606 55.68,46.606 56.433,46.606 57.187,46.606 57.941,46.606 58.695,46.606 59.449,46.606 60.203,46.606 60.957,46.606 61.711,46.606 62.465,46.606 63.219,46.606 63.973,46.606 64.727,46.606 65.481,46.606 66.235,46.606 66.989,46.606 67.743,46.606 68.497,46.606 69.251,46.606 70.005,46.606 70.759,46.606 71.513,46.606 72.267,46.606 73.021,46.606 73.775,46.606 74.529,46.606 75.283,46.606 76.037,46.606 76.791,46.606 77.545,46.606 78.299,46.606 79.053,46.606 79.807,46.606 80.561,46.606 81.315,46.606 82.069,46.606 82.823,46.606 83.577,46.606 84.331,46.606 85.085,46.606 85.839,46.606 86.593,46.606 87.347,46.606 88.101,46.606 88.855,46.606 89.609,46.606 90.363,46.606 91.117,46.606 91.871,46.606 92.625,46.606 93.379,46.606 94.133,46.606 94.887,46.606 95.641,46.606 96.395,46.606 97.149,46.606 97.903,46.606 98.657,46.606 99.411,46.606 100.165,46.606 100.919,46.606 101.673,46.606 102.427,46.606 103.181,46.606 106.336,46.896 2.651,47.285 6.026,47.334 105.803,47.429 5.325,47.613 8.211,47.712 8.965,47.712 3.202,47.801 4.667,47.98 9.625,47.977 105.27,47.962 3.916,48.043 10.349,48.094 104.735,48.493 10.905,48.603 11.639,48.774 12.393,48.774 13.147,48.774 13.901,48.774 14.655,48.774 15.409,48.774 16.163,48.774 16.917,48.774 17.671,48.774 18.425,48.774 19.179,48.774 19.933,48.774 20.687,48.774 21.441,48.774 22.195,48.774 22.949,48.774 23.703,48.774 24.457,48.774 25.211,48.774 25.965,48.774 26.719,48.774 27.473,48.774 28.227,48.774 28.981,48.774 29.735,48.774 30.489,48.774 31.243,48.774 31.997,48.774 32.751,48.774 33.505,48.774 34.259,48.774 35.013,48.774 35.767,48.774 36.521,48.774 37.275,48.774 38.029,48.774 38.783,48.774 39.537,48.774 40.291,48.774 41.045,48.774 41.799,48.774 42.553,48.774 43.307,48.774 44.061,48.774 44.815,48.774 45.569,48.774 46.323,48.774 47.077,48.774 47.831,48.774 48.585,48.774 49.339,48.774 50.093,48.774 50.847,48.774 51.601,48.774 52.355,48.774 53.109,48.774 53.863,48.774 54.617,48.774 55.371,48.774 56.125,48.774 56.879,48.774 57.633,48.774 58.387,48.774 59.141,48.774 59.895,48.774 60.649,48.774 61.403,48.774 62.157,48.774 62.911,48.774 63.665,48.774 64.419,48.774 65.173,48.774 65.927,48.774 66.681,48.774 67.435,48.774 68.189,48.774 68.943,48.774 69.697,48.774 70.451,48.774 71.205,48.774 71.959,48.774 72.713,48.774 73.467,48.774 74.221,48.774 74.975,48.774 75.729,48.774 76.483,48.774 77.237,48.774 77.991,48.774 78.745,48.774 79.499,48.774 80.253,48.774 81.007,48.774 81.761,48.774 82.515,48.774 83.269,48.774 84.023,48.774 84.777,48.774 85.531,48.774 86.285,48.774 87.039,48.774 87.793,48.774 88.547,48.774 89.301,48.774 90.055,48.774 90.809,48.774 91.563,48.774 92.317,48.774 93.071,48.774 93.825,48.774 94.579,48.774 95.333,48.774 96.087,48.774 96.841,48.774 97.595,48.774 98.349,48.774 99.103,48.774 99.857,48.774 100.611,48.774 101.365,48.774 102.119,48.774 102.873,48.774 104.034,48.771 58.625,62.475 59.3,62.475 78.344,62.965 58.986,62.981 77.694,63.315 78.944,63.315 58.336,63.331 59.586,63.331 78.344,63.665 58.986,63.681 58.336,64.081 59.586,64.081 77.694,64.065 78.944,64.065 132.267,64.354 78.344,64.465 58.986,64.481 77.694,64.815 78.944,64.815 58.336,64.831 59.586,64.831 78.344,65.065 58.986,65.081 78.316,66.47 94.944,66.71 92.931,66.735 93.906,66.74 98.669,66.785 59.025,67.017 93.531,67.135 94.431,67.135 78.325,67.35 92.931,67.635 93.931,67.635 94.881,67.645 168.475,67.825 169.4,67.825 93.431,68.135 94.431,68.135 93.85,68.55 92.944,68.565 94.888,68.565 169.4,68.75 97.899,69.263 98.745,69.263 168.607,70.3 109.584,72.02 107.416,72.446 109.584,72.774 107.416,73.2 109.584,73.528 107.416,73.954 109.584,74.282 107.416,74.708 22.115,74.99 20.868,75.02 21.498,75.04 109.584,75.036 107.416,75.462 22.103,75.717 20.898,75.74 21.488,75.72 109.584,75.79 107.416,76.216 20.85,76.3 21.502,76.289 22.103,76.292 109.584,76.544 107.416,76.97 109.584,77.298 107.416,77.724 109.584,78.052 107.416,78.478 109.584,78.806 107.175,79.192 109.567,79.56 109.209,80.224 108.676,80.757 108.143,81.29 4.406,81.464 3.653,81.506 5.113,81.726 107.61,81.823 2.985,81.855 10.112,82.119 5.649,82.256 107.077,82.356 6.391,82.387 7.145,82.387 7.899,82.387 8.653,82.387 2.513,82.443 11.459,82.597 106.543,82.89 2.325,83.173 11.826,83.255 106.01,83.423 102.909,83.458 12.459,83.666 13.213,83.666 13.967,83.666 14.721,83.666 15.475,83.666 16.229,83.666 16.983,83.666 17.737,83.666 18.491,83.666 19.245,83.666 19.999,83.666 20.753,83.666 21.507,83.666 22.261,83.666 23.015,83.666 23.769,83.666 24.523,83.666 25.277,83.666 26.031,83.666 26.785,83.666 27.539,83.666 28.293,83.666 29.047,83.666 29.801,83.666 30.555,83.666 31.309,83.666 32.063,83.666 32.817,83.666 33.571,83.666 34.325,83.666 35.079,83.666 35.833,83.666 36.587,83.666 37.341,83.666 38.095,83.666 38.849,83.666 39.603,83.666 40.357,83.666 41.111,83.666 41.865,83.666 42.619,83.666 43.373,83.666 44.127,83.666 44.881,83.666 45.635,83.666 46.389,83.666 47.143,83.666 47.897,83.666 48.651,83.666 49.405,83.666 50.159,83.666 50.913,83.666 51.667,83.666 52.421,83.666 53.175,83.666 53.929,83.666 54.683,83.666 55.437,83.666 56.191,83.666 56.945,83.666 57.699,83.666 58.453,83.666 59.207,83.666 59.961,83.666 60.715,83.666 61.469,83.666 62.223,83.666 62.977,83.666 63.731,83.666 64.485,83.666 65.239,83.666 65.993,83.666 66.747,83.666 67.501,83.666 68.255,83.666 69.009,83.666 69.763,83.666 70.517,83.666 71.271,83.666 72.025,83.666 72.779,83.666 73.533,83.666 74.287,83.666 75.041,83.666 75.795,83.666 76.549,83.666 77.303,83.666 78.057,83.666 78.811,83.666 79.565,83.666 80.319,83.666 81.073,83.666 81.827,83.666 82.581,83.666 83.335,83.666 84.089,83.666 84.843,83.666 85.597,83.666 86.351,83.666 87.105,83.666 87.859,83.666 88.613,83.666 89.367,83.666 90.121,83.666 90.875,83.666 91.629,83.666 92.383,83.666 93.137,83.666 93.891,83.666 94.645,83.666 95.399,83.666 96.153,83.666 96.907,83.666 97.661,83.666 98.415,83.666 99.169,83.666 99.923,83.666 100.677,83.666 101.431,83.666 102.185,83.666 2.455,83.916 105.477,83.956 104.944,84.489 2.871,84.545 5.674,84.555 7.936,84.555 8.69,84.555 9.25,84.75 4.98,84.85 3.509,84.946 10.25,85 104.411,85.022 4.255,85.056 10.721,85.216 103.876,85.553 11.292,85.707 12.036,85.834 12.79,85.834 13.544,85.834 14.298,85.834 15.052,85.834 15.806,85.834 16.559,85.834 17.313,85.834 18.067,85.834 18.821,85.834 19.575,85.834 20.329,85.834 21.083,85.834 21.837,85.834 22.591,85.834 23.345,85.834 24.099,85.834 24.853,85.834 25.607,85.834 26.361,85.834 27.115,85.834 27.869,85.834 28.623,85.834 29.377,85.834 30.131,85.834 30.885,85.834 31.639,85.834 32.393,85.834 33.147,85.834 33.901,85.834 34.655,85.834 35.409,85.834 36.163,85.834 36.917,85.834 37.671,85.834 38.425,85.834 39.179,85.834 39.933,85.834 40.687,85.834 41.441,85.834 42.195,85.834 42.949,85.834 43.703,85.834 44.457,85.834 45.211,85.834 45.965,85.834 46.719,85.834 47.473,85.834 48.227,85.834 48.981,85.834 49.735,85.834 50.489,85.834 51.243,85.834 51.997,85.834 52.751,85.834 53.505,85.834 54.259,85.834 55.013,85.834 55.767,85.834 56.521,85.834 57.275,85.834 58.029,85.834 58.783,85.834 59.537,85.834 60.291,85.834 61.045,85.834 61.799,85.834 62.553,85.834 63.307,85.834 64.061,85.834 64.815,85.834 65.569,85.834 66.323,85.834 67.077,85.834 67.831,85.834 68.585,85.834 69.339,85.834 70.093,85.834 70.847,85.834 71.601,85.834 72.355,85.834 73.109,85.834 73.863,85.834 74.617,85.834 75.371,85.834 76.125,85.834 76.879,85.834 77.633,85.834 78.387,85.834 79.141,85.834 79.895,85.834 80.649,85.834 81.403,85.834 82.157,85.834 82.911,85.834 83.665,85.834 84.419,85.834 85.173,85.834 85.927,85.834 86.681,85.834 87.435,85.834 88.189,85.834 88.943,85.834 89.697,85.834 90.451,85.834 91.205,85.834 91.959,85.834 92.713,85.834 93.467,85.834 94.221,85.834 94.975,85.834 95.729,85.834 96.483,85.834 97.237,85.834 97.991,85.834 98.745,85.834 99.499,85.834 100.253,85.834 101.007,85.834 101.761,85.834 102.515,85.834 103.175,85.831
  other v2: 33.048,29.2 33.75,29.2 30.75,29.264 31.556,29.264 32.356,29.264 32.75,29.771 33.5,29.771 31.25,29.817 31.984,29.817 31.612,30.5 32.356,30.5 33.048,30.5 33.75,30.5 30.75,30.521 33.5,31.057 31.25,31.098 31.984,31.098 32.688,31.098 33.048,31.705 33.75,31.705 30.75,31.75 31.556,31.75 32.25,31.75 31.167,32.299 33.5,32.29 31.958,32.321 32.708,32.314 30.75,32.88 31.556,32.88 32.3,32.88 33.048,32.88 33.75,32.88 31.25,33.56 31.918,33.56 32.75,33.56 33.5,33.587 30.75,34.153 31.5,34.153 32.254,34.153 33.048,34.153 33.75,34.153 141.299,63.192 143.959,63.175 142.709,63.208 147.359,63.209 144.699,63.225 146.109,63.242 141.879,63.765 143.334,63.765 145.279,63.799 146.734,63.799 142.709,64.179 141.397,64.233 143.959,64.233 146.109,64.212 144.797,64.266 147.359,64.266 143.334,64.679 146.734,64.712 141.928,64.765 145.328,64.799 141.348,65.125 142.709,65.125 143.959,65.125 144.748,65.159 146.109,65.159 147.359,65.159 146.703,65.555 142.006,65.643 145.438,65.662 141.269,65.962 143.929,65.945 144.699,65.962 147.359,65.945 142.679,65.979 146.109,65.979 33.048,66.2 33.75,66.2 30.75,66.264 31.556,66.264 32.356,66.264 141.849,66.535 143.304,66.535 145.279,66.535 146.734,66.535 32.75,66.771 33.5,66.771 31.25,66.817 31.984,66.817 142.679,66.949 146.109,66.949 141.367,67.003 143.929,67.003 144.797,67.003 147.359,67.003 143.304,67.449 146.734,67.449 31.612,67.5 32.356,67.5 33.048,67.5 33.75,67.5 30.75,67.521 141.898,67.535 145.328,67.535 141.318,67.895 142.679,67.895 143.929,67.895 144.748,67.895 146.109,67.895 147.359,67.895 33.5,68.057 31.25,68.098 31.984,68.098 32.688,68.098 33.048,68.705 33.75,68.705 30.75,68.75 31.556,68.75 32.25,68.75 31.25,69.29 33.5,69.29 31.926,69.31 32.675,69.33 30.75,69.88 31.556,69.88 32.3,69.88 33.048,69.88 33.75,69.88 31.25,70.56 31.918,70.56 32.75,70.56 33.5,70.587 30.75,71.153 31.5,71.153 32.254,71.153 33.048,71.153 33.75,71.153 171.126,76.259 141.402,77.353 142.651,77.353 144.012,77.353 144.832,77.353 146.081,77.353 147.442,77.353 135.976,77.423 137.225,77.423 138.586,77.423 143.432,77.713 146.862,77.713 138.006,77.783 142.026,77.799 145.456,77.799 136.6,77.87 141.402,78.246 143.963,78.246 144.832,78.246 147.393,78.246 142.651,78.299 146.081,78.299 135.976,78.316 138.537,78.316 137.225,78.37 142.026,78.713 143.481,78.713 145.456,78.713 146.911,78.713 136.6,78.783 138.055,78.783 142.651,79.27 146.081,79.27 144.061,79.287 147.491,79.287 141.402,79.303 144.832,79.303 137.225,79.34 135.976,79.373 138.635,79.357 170.606,79.502 143.345,79.626 146.812,79.714 141.402,80.09 142.651,80.09 144.012,80.09 144.802,80.123 146.051,80.123 147.412,80.123 143.432,80.45 146.832,80.483 142.026,80.536 145.426,80.57 141.402,80.982 143.963,80.982 144.802,81.016 147.363,81.016 142.651,81.036 146.051,81.07 142.026,81.45 143.481,81.45 145.426,81.483 146.881,81.483 142.651,82.007 141.402,82.04 144.061,82.023 146.051,82.04 147.461,82.057 144.802,82.073
  other v3: 142.041,20.735 140.155,20.765 144.08,20.794 140.14,22.728 142.103,22.743 144.065,22.757 140.126,24.69 142.088,24.705 144.05,24.719
HWREV0: IC16.29 R75.2 | length 2.4
  L1 w0.152: IC16.29@145.553,21.992 147.153,21.992 147.378,21.767 R75.2@147.83,21.767
HWREV1: IC16.30 R76.2 | length 2.4
  L1 w0.152: IC16.30@145.553,22.492 146.417,22.492 146.667,22.742 R76.2@147.83,22.742
HWREV2: IC16.3 R77.2 | length 2.7
  L1 w0.152: R77.2@136.305,25.443 137.107,25.443 138.058,24.492 IC16.3@138.653,24.492
HWREV3: IC16.4 R78.2 | length 2.6
  L1 w0.152: R78.2@136.258,24.505 137.095,24.505 137.608,23.992 IC16.4@138.653,23.992
I2C1_SCL: IC16.45 T_IC9.3 T_R68.1 | length 14.9
  L1 w0.127: IC16.45@140.853,26.192 v1(140.853,32.305)
  L1 w0.152: T_R68.1@133.905,33.599 133.925,33.599 134.139,33.385 134.139,33.365 134.429,33.076 T_IC9.3@134.429,32.11
  L3 w0.127: v1(134.429,32.964) 135.508,31.885 138.219,31.885 138.639,32.305 v1(140.853,32.305)
I2C1_SDA: IC16.43 T_IC9.2 T_R67.1 | length 15.3
  L1 w0.127: T_R67.1@135.024,33.59 135.25,33.364 135.303,33.364 v1(135.883,32.784) ; IC16.43@141.853,26.192 v1(141.853,32.746)
  L1 w0.152: T_IC9.2@134.829,32.11 134.829,32.723 134.882,32.777 134.882,33.152 134.873,33.161 134.873,33.44 T_R67.1@135.024,33.59
  L3 w0.127: v1(135.883,32.784) 135.914,32.753 137.029,32.753 137.042,32.766 137.407,32.766 137.421,32.753 141.846,32.753 v1(141.853,32.746)
I2C2_SCL: IC16.21 R109.1 U2.2 | length 21.8
  L1 w0.152: R109.1@131.29,8.837 131.29,9.414 131.665,9.789 U2.2@131.665,10.642 ; v2(131.66,11.877) 131.663,11.874 U2.2@131.663,10.75 ; v2(135.028,11.644) 142.022,11.644 143.115,12.737 143.115,18.038 143.398,18.32 143.398,18.737 143.394,18.74 143.394,19.251 IC16.21@143.353,19.292
  L3 w0.152: v2(131.66,11.877) 134.025,11.877 134.259,11.644 v2(135.028,11.644)
I2C2_SDA: IC16.25 R120.1 U2.3 | length 28.2
  L1 w0.152: U2.3@132.163,10.75 v2(132.163,12.455) ; U2.3@132.165,10.642 132.165,9.703 132.319,9.55 R120.1@132.319,8.837 ; v1(143.398,11.974) 145.843,11.974 148.335,14.466 148.335,17.952 146.295,19.992 IC16.25@145.553,19.992
  L3 w0.152: v2(132.163,12.455) 135.199,12.455 135.352,12.608 135.728,12.608 135.881,12.455 136.213,12.455 136.694,11.974 v1(143.398,11.974)
I2C_OE: R53.2 T_IC9.5 T_R69.2 | length 2.3
  L1 w0.152: R53.2@131.529,31.655 131.548,31.635 T_IC9.5@133.849,31.635
I_bias0_0: IC16.18 R62A.1 T1.1 T6A.1 | length 278.5
  L1 w0.152: R62A.1@35.984,61.405 36.97,61.405 T6A.1@37.218,61.156 ; T6A.1@37.218,60.96 T6A.1@37.218,61.156 ; v1(37.771,61.769) 37.771,61.713 37.218,61.16 T6A.1@37.218,61.156 ; T1.1@52.985,94.62 53.202,94.404 v1(53.965,94.404) ; v1(115.222,92.366) 115.222,80.612 115.097,80.487 115.097,67.151 v1(115.603,66.644) ; v1@115.608,66.649 116,66.257 116,49.855 116.084,49.771 116.084,42.823 115.847,42.585 v1(115.847,42.491) ; v1(141.853,18.523) IC16.18@141.853,19.292 ; v1(155.343,21.572) 155.343,29.45 155.442,29.549 155.442,31.584 155.314,31.712 155.314,33.868 155.442,33.996 v1(155.442,42.54) v1@155.375,42.606
  L3 w0.152: v1(37.771,61.769) 38.2,61.34 40.019,61.34 46.771,68.092 90.658,68.092 92.657,66.093 95.347,66.093 96.004,66.75 96.459,66.75 96.68,66.529 96.779,66.529 97.94,65.368 100.718,65.368 100.971,65.621 101.109,66.324 103.087,68.302 103.419,68.302 103.537,68.42 107.684,68.42 109.637,66.467 115.161,66.467 115.272,66.578 115.536,66.578 v1(115.603,66.644) ; v1(53.965,94.404) 54.019,94.35 96.121,94.35 99.429,91.042 108.506,91.042 109.83,92.366 v1(115.222,92.366) ; v1(115.847,42.491) 135.539,42.491 135.685,42.345 155.178,42.345 155.373,42.54 v1(155.442,42.54) ; v1(141.853,18.523) 141.853,18.556 143.068,19.772 146.636,19.772 148.067,21.203 153.269,21.203 153.637,21.572 v1(155.343,21.572)
I_bias0_1: IC16.20 R71A.1 T3.1 T7A.1 | length 267
  L1 w0.152: R71A.1@40.41,60.69 41.361,60.69 41.61,60.939 T7A.1@41.61,60.96 v1(41.61,62) ; T3.1@59.114,94.709 59.314,94.709 59.538,94.933 59.538,95.494 59.675,95.631 v1(59.675,95.725) ; v1(108.75,66.675) 108.817,66.742 109.215,66.742 109.305,66.831 111.776,66.831 112.107,67.162 114,67.162 114.047,67.115 114.491,67.115 ; v1(114.375,95.575) 114.375,89.991 114.491,89.875 114.491,67.115 ; v1(115.631,43.2) 115.631,65.975 114.491,67.115 ; IC16.20@142.853,19.292 142.874,19.271 142.874,18.55 v1(142.894,18.529) ; v1(154.86,42.798) 154.86,42.704 154.988,42.576 154.988,42.162 155.162,41.988 155.162,34.111 155.035,33.984 155.035,31.596 155.162,31.469 155.162,29.665 154.89,29.392 154.89,20.908 v1(154.884,20.902)
  L3 w0.152: v1(41.61,62) 42.533,62.923 43.944,62.923 47.284,66.263 72.181,66.263 72.63,65.813 95.563,65.813 96,66.25 96.664,66.25 97.825,65.089 100.834,65.089 101.25,65.506 101.388,66.209 103.202,68.023 103.535,68.023 103.653,68.141 107.569,68.141 108.161,67.548 108.161,67.264 v1(108.75,66.675) ; v1(59.675,95.725) 75.448,95.725 75.706,95.467 94.807,95.467 94.928,95.588 98.971,95.588 v2(98.975,95.593) ; v2(107.61,94.578) 107.688,94.5 110.383,94.5 111.458,95.575 v1(114.375,95.575) ; v1(115.631,43.2) 138.17,43.2 138.572,42.798 v1(154.86,42.798) ; v1(142.894,18.529) 142.894,18.592 143.577,19.275 146.534,19.275 148.183,20.924 154.862,20.924 v1(154.884,20.902)
  L4 w0.152: v2(98.975,95.593) 98.993,95.575 100.926,95.575 102.255,96.903 105.207,96.903 107.532,94.578 v2(107.61,94.578)
I_bias1_0: IC16.41 R62B.1 T4.1 T6B.1 | length 252.1
  L1 w0.152: R62B.1@35.984,24.405 36.97,24.405 T6B.1@37.218,24.156 ; T6B.1@37.218,23.96 T6B.1@37.218,24.156 ; v1(37.877,24.621) 37.81,24.554 37.613,24.554 37.218,24.16 T6B.1@37.218,24.156 ; T4.1@60.386,4.518 v1(60.386,5.14) ; v1(123.5,4.763) 123.5,28.82 123.567,28.887 123.567,29.808 123.647,29.889 v1(123.647,40.549) ; IC16.41@142.853,26.192 142.853,27.996 142.856,27.999 142.856,28.747 v1(142.853,28.75) ; v1(154.388,28.997) 154.322,29.064 154.322,29.598 154.256,29.665 154.256,35.128 154.43,35.302 v1(154.43,40.952)
  L3 w0.152: v1(37.877,24.621) 37.926,24.621 38.24,24.307 39.307,24.307 39.5,24.5 40.179,24.5 47.229,31.55 90.2,31.55 91.897,29.853 93.172,29.853 93.343,29.682 95.936,29.682 96.004,29.75 96.559,29.75 96.889,29.42 101.931,29.42 102.02,29.509 102.303,30.079 103.421,31.197 103.535,31.24 103.566,31.252 103.589,31.275 103.721,31.407 103.958,31.407 103.963,31.412 107.298,31.412 107.303,31.407 107.357,31.407 107.697,31.068 107.899,30.866 109.485,29.28 116.854,29.28 117.015,29.44 122.248,29.44 122.456,29.648 v1(123.5,29.648) ; v1(60.386,5.14) 66.393,5.14 66.846,4.687 87.422,4.687 87.754,4.356 93.267,4.356 94.186,3.437 107.74,3.437 109.04,4.737 123.474,4.737 v1(123.5,4.763) ; v1(123.647,40.549) 123.654,40.549 123.927,40.822 124.063,40.822 124.193,40.952 v1(154.43,40.952) ; v1(142.853,28.75) 143.743,28.75 143.99,28.997 v1(154.388,28.997)
I_bias1_1: IC16.40 R71B.1 T7B.1 T12.1 | length 243.1
  L1 w0.152: R71B.1@40.41,23.69 41.361,23.69 41.61,23.939 T7B.1@41.61,23.96 v1(41.61,25) ; T12.1@66.838,4.558 66.95,4.67 v1(66.95,5.425) ; v1(123.875,41.275) 123.875,41.237 124.1,41.012 v1(124.1,5.19) ; v1(143.31,29.895) 143.31,26.235 IC16.40@143.353,26.192 ; v1@154.668,41.8 v1@154.668,41.913 ; v1(154.709,29.904) 154.709,34.053 154.883,34.227 154.883,41.148 154.71,41.321 v1(154.709,41.8)
  L3 w0.152: v1(41.61,25) 42.533,25.923 43.75,25.923 45.864,28.037 45.924,28.037 47.584,29.697 71.747,29.697 71.87,29.574 92.625,29.574 93.058,29.141 102.085,29.141 102.148,29.141 102.238,29.23 102.583,29.963 103.537,30.917 103.651,30.961 103.681,30.972 103.704,30.995 103.837,31.128 104.074,31.128 104.079,31.133 107.183,31.133 107.187,31.128 107.242,31.128 107.581,30.788 107.783,30.586 109.369,29 116.97,29 117.121,29.151 v1(124.1,29.151) ; v1(66.95,5.425) 70.273,5.425 70.542,5.693 86.163,5.693 86.666,5.19 92.828,5.19 94.301,3.716 107.624,3.716 109.098,5.19 123.286,5.19 123.312,5.216 123.688,5.216 123.714,5.19 v1(124.1,5.19) ; v1(123.875,41.275) 124.4,41.8 v1@154.703,41.8 ; v1@143.319,29.904 v1(154.709,29.904)